# Altium PCB 14871_V1I1.PcbDoc (part 1 of 2)
Units mm, origin at the board's own origin, x right, y up, seen from the top; angles counter-clockwise.
Board outline 80 x 35 mm, 2 copper layers (L1, L2), stack 1.671 mm thick; 58 components, 31 nets, 145 pads, 63 vias.
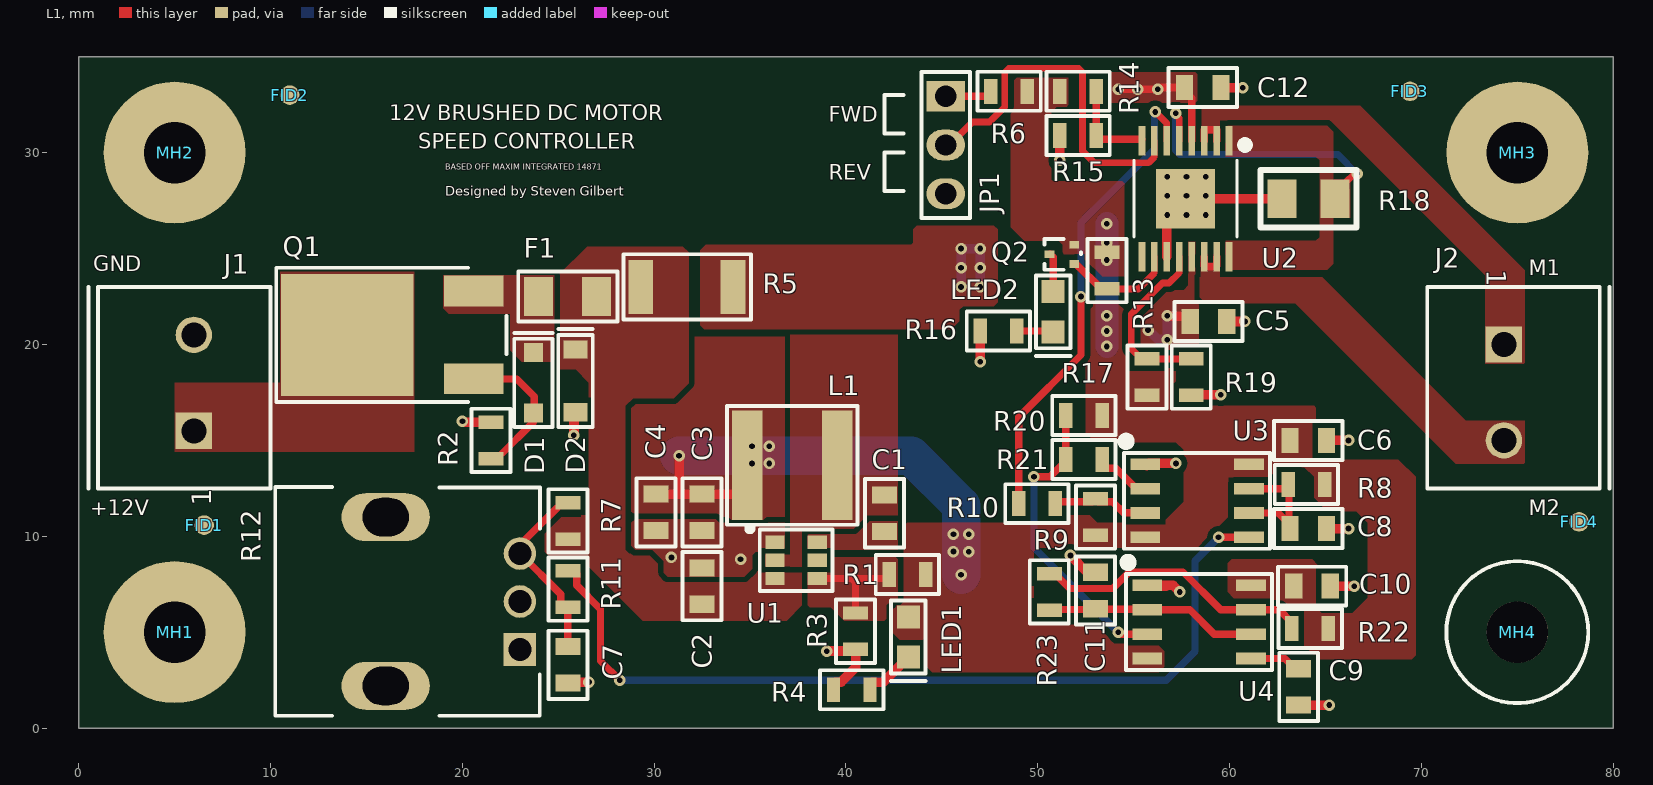
[diagram p0: L1 view]
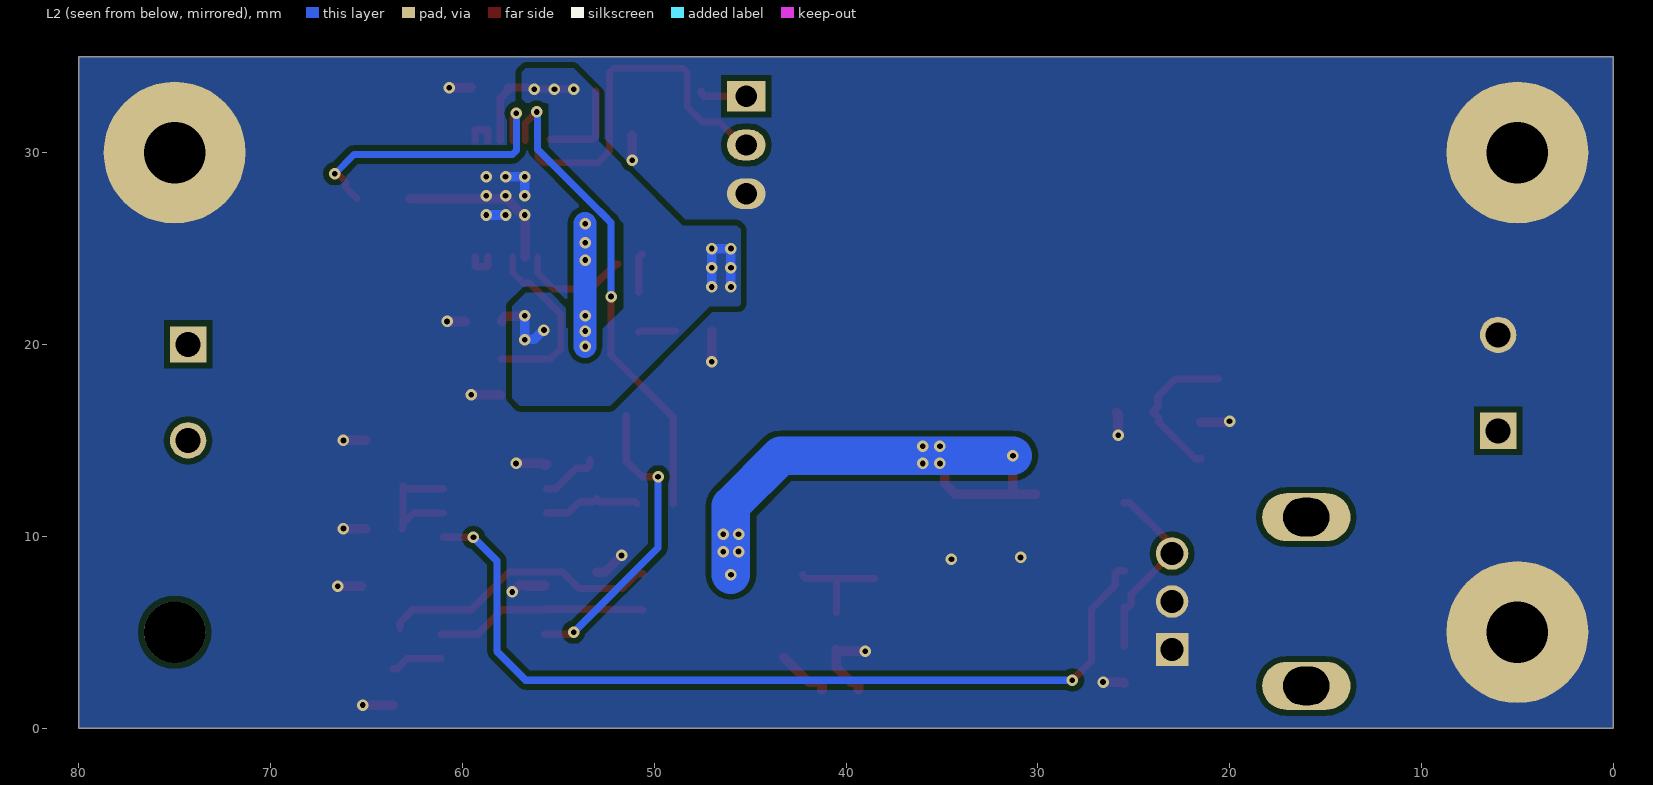
[diagram p1: L2 view, seen from below]

## Layer stack, top to bottom
Top Solder: solder mask 0.0102, Solder Resist, Dk 3.5
L1: signal copper 0.0356
Dielectric 1: dielectric 1.6, FR-4, Dk 4.8
L2: signal copper 0.0356
Bottom Solder: solder mask 0.0102, Solder Resist, Dk 3.5

## Board outline
0,0 80,0 80,35 0,35

## Design rules (kind name [scope] priority, off if disabled: settings)
Clearance Around_Polygons [IsRegion] p1: gap=0.3 ignorepadtopadclearanceinfootprint=FALSE
Clearance [All] p2: gap=0.2 ignorepadtopadclearanceinfootprint=FALSE
ComponentClearance [All] p1: gap=0.2 collisioncheckmode=3 verticalgap=0.2 showdistances=FALSE
HoleSize [All] p1: absolutevalues=TRUE maxlimit=10 minlimit=0.2 maxpercent=80.000 minpercent=20.000
HoleToHoleClearance [All] p1: gap=0.3 allowstackedmicrovias=TRUE
MinimumSolderMaskSliver [All] p1: minsoldermaskwidth=0.178
PolygonConnect [All] p1: connectstyle=Direct reliefconductorwidth=0.254 reliefentries=4 polygonreliefangle="90 Angle" airgapwidth=0.254
RoutingVias [All] p1: holewidth=0.3 width=0.6 viastyle="Through Hole" minholewidth=0.3 minwidth=0.6 maxholewidth=0.3 maxwidth=0.6
SilkToSilkClearance [All] p1: silktosilkclearance=0.1
SilkToSolderMaskClearance [IsPad] p1: minsilkscreentomaskgap=0.1 clearancetoexposedcopper=TRUE
SolderMaskExpansion [All] p1: expansion=0.1 istentingtop=FALSE
Width "Power Nets" [InNet('+*') or InNet('+12V') or InNet('+12V_DRIVER') or InNet('+5V')or InNet('+VIN') or InNet('M1') or InNet('M2') or InNet('VOUT') or InNet('VIN')] p1: maxlimit=4 minlimit=0.4 preferedwidth=0.4
Width [All] p2: maxlimit=0.5 minlimit=0.3 preferedwidth=0.3
24 further rules are at their usual default settings.

## Components (designator, comment, footprint, x,y, rotation, side; value= is the part's Value field where it differs from the comment)
C1 "0.1uF" C0805 42,11.2 r270 top
C2 "10uF" C0805 32.5,7.4 r270 top
C3 "22uF" C0805 32.5,11.25 r90 top
C4 "22uF" C0805 30.1,11.25 r90 top
C5 "1uF" C0805 58.9,21.2 r180 top
C6 "0.1uF" C0805 64.1,15 r0 top
C7 "0.1uF" C0805 25.5,3.3 r90 top
C8 "0.01uF" C0805 64.1,10.4 r180 top
C9 "0.1uF" C0805 63.6,2.15 r90 top
C10 "0.1uF" C0805 64.3,7.4 r0 top
C11 "0.01uF" C0805 53,7.173 r270 top
C12 "1uF" C0805 58.6,33.4 r180 top
D1 "10V" SOD123_ZENER 23.7,18 r270 top
D2 "16V" TVS_SOD123FL 25.9,18.1 r270 top
F1 "3A" FUSE1206 25.48,22.5 r0 top
FID1 "FID_1MM" FID_40X120D 6.541,10.583 r0 top
FID2 "FID_1MM" FID_40X120D 11,33 r90 top
FID3 "FID_1MM" FID_40X120D 69.4,33.2 r90 top
FID4 "FID_1MM" FID_40X120D 78.222,10.755 r180 top
J1 "1935161" 1935161 6,15.5 r180 top locked
J2 "1935161" 1935161 74.3,20 r0 top locked
JP1 "HDR 1x3" HDR_1X3_2.54MM 45.2,32.94 r0 top
L1 "4.7uH" NR6028T4R7M 37.2,13.7 r180 top
LED1 "LGR971-K1-1" "LED0805 - GREEN" 43.25,4.75 r90 top
LED2 "LSR976-NR-1" LED0805 50.8,21.7 r90 top
MH1 "MH_7.4MMC_3.2MMD" MH_7.4MMC_3.2MMD#1 5,5 r0 top
MH2 "MH_7.4MMC_3.2MMD" MH_7.4MMC_3.2MMD#2 5,36 r0 top
MH3 "MH_7.4MMC_3.2MMD" MH_7.4MMC_3.2MMD#3 46,34 r0 top
MH4 "MH_7.4MMNC_3.2MMD" MH_7.4MMD_3.2MMD_NON_COPPER_NPTH 75,5 r0 top
Q1 "AOD413A" TO252 17.3,20.5 r180 top
Q2 "DMP21D0UT-7" SOT523 51.255,24.7 r0 top
R1 "52K3" R0805 43.2,8 r180 top
R2 "200R" R0805 21.5,15 r90 top
R3 "10K" R0805 40.5,5.05 r270 top
R4 "200R" R0805 40.3,2 r180 top
R5 "0R" R2010 31.7,23 r180 top
R6 "1K" R0805 48.5,33.2 r180 top
R7 "7K15" R0805 25.5,10.8 r90 top
R8 "1K" R0805 64,12.7 r180 top
R9 "1K" R0805 53,11 r90 top
R10 "0R" R0805 49.95,11.7 r0 top
R11 "0R" R0805 25.5,7.25 r270 top
R12 "5K" TRIM_PT01-D120D-B502 16,6.6 r90 top locked
R13 "1K" R0805 53.6,23.85 r270 top
R14 "5K6" R0805 52.1,33.2 r0 top
R15 "1K" R0805 52.1,30.9 r180 top
R16 "200R" R0805 47.95,20.7 r180 top
R17 "4K02" R0805 55.7,18.3 r90 top
R18 "0R1" R1206 64.115,27.6 r180 top
R19 "1K" R0805 58,18.3 r270 top
R20 "1K" R0805 52.4,16.3 r180 top
R21 "0R" R0805 52.4,14 r180 top
R22 "3K" R0805 64.2,5.2 r180 top
R23 "1K" R0805 50.6,7.1 r270 top
U1 "AP62200WU-7" TSOT26 37.4,8.75 r0 top
U2 "MAX14871EUE+T" 21-0108_U16E+3_MXM-M 57.7,27.6 r270 top locked
U3 "NE555DR" 8-SOIC 58.3,11.85 r0 top
U4 "NE555DR" 8-SOIC 58.405,5.535 r0 top

## Footprints (in the part's own frame and the unit in brackets; to place one, negate y for a bottom-side part, rotate by r counter-clockwise, add the part's x,y. Pads: shape width x height; smd on the part's side, far side on the other; paste and mask are expansions set on the pad)
8-SOIC [mil]
  rect 61x24 smd: 1(-106.5,75) 2(-106.5,25) 3(-106.5,-25) 4(-106.5,-75) 5(106.5,-75) 6(106.5,-25) 7(106.5,25) 8(106.5,75)
  silkscreen extent -154,-98 150,130, body extent -118,-96 118,97, height 69
21-0108_U16E+3_MXM-M [mm]
  rect 1.553x0.355 smd paste+0 mask+0: 1(-3.025,2.275) 2(-3.025,1.625) 3(-3.025,0.975) 4(-3.025,0.325) 5(-3.025,-0.325) 6(-3.025,-0.975) 7(-3.025,-1.625) 8(-3.025,-2.275) 9(3.025,-2.275) 10(3.025,-1.625) 11(3.025,-0.975) 12(3.025,-0.325) 13(3.025,0.325) 14(3.025,0.975) 15(3.025,1.625) 16(3.025,2.275)
  rect 3.099x3.099 smd paste-1.537 mask+0: EPAD(0,0)
  silkscreen extent -2.95,-2.68 2,3.25, body extent -3.25,-2.55 3.25,2.55, height 1.09
1935161 [mm]
  rect 1.9x1.9 hole 1.3: 1(0,0)
  round 1.9 hole 1.3: 2(0,-5)
  silkscreen extent -4,-7.5 5.5,3, body extent -4,-7.45 5,2.95, height 11.41
C0805 [mm]
  rect 0.9x1.3 smd: 1(-0.95,0) 2(0.95,0)
  silkscreen extent -1.78,-1.02 1.78,1.02, body extent -1,-0.6 1,0.6, height 1.45
FID_40X120D [mil]
  round 40 smd paste-40 mask+40: 1(0,0)
FUSE1206 [mm]
  rect 1.52x2.03 smd: 1(-1.52,0) 2(1.52,0)
  silkscreen extent -2.56,-1.3 2.6,1.3, body extent -1.7,-0.9 1.7,0.9, height 1.17
HDR_1X3_2.54MM [mm]
  rect 2x1.6 hole 1.1: 1(0,0)
  oval 2x1.6 hole 1.1: 2(0,-2.54) 3(0,-5.08)
  silkscreen extent -1.27,-6.35 1.27,1.27, body extent -1.27,-6.35 1.27,1.27, height 9.21
LED0805 [mm]
  rect 1.2x1.2 smd: A(1.05,0) K(-1.05,0)
  silkscreen extent -2.3,-0.9 1.9,0.9, body extent -1,-0.62 1,0.63, height 1.11
"LED0805 - GREEN" [mm]
  rect 1.2x1.2 smd: A(1.05,0) K(-1.05,0)
  silkscreen extent -2.3,-0.9 1.9,0.9, body extent -1.01,-0.62 1.01,0.63, height 1.1
MH_7.4MMC_3.2MMD#1 [mm]
  round 7.4 hole 3.2: 1(0,0)
MH_7.4MMC_3.2MMD#2 [mm]
  round 7.4 hole 3.2: 1(0,-6)
MH_7.4MMC_3.2MMD#3 [mm]
  round 7.4 hole 3.2: 1(29,-4)
MH_7.4MMD_3.2MMD_NON_COPPER_NPTH [mm]
  round 3.2 hole 3.2 unplated: 1(0,0)
  silkscreen extent -3.7,-3.7 3.7,3.7
NR6028T4R7M [mm]
  rect 1.6x5.7 smd: 1(-2.35,0) 2(2.35,0)
  silkscreen extent -3.4,-3.1 3.4,3.1, body extent -3,-3 3,3, height 2.8
R0805 [mm]
  rect 0.7x1.3 smd: 1(-0.95,0) 2(0.95,0)
  silkscreen extent -1.65,-1.02 1.65,1.02, body extent -1.15,-0.68 1.15,0.68, height 0.72
R1206 [mm]
  rect 1.5x2 smd: 1(-1.385,0) 2(1.385,0)
  silkscreen extent -2.5,-1.5 2.5,1.5, body extent -1.6,-0.83 1.6,0.83, height 0.57
R2010 [mm]
  rect 1.3x2.8 smd: 1(-2.4,0) 2(2.4,0)
  silkscreen extent -3.35,-1.7 3.3,1.7, body extent -2.5,-1.25 2.5,1.25, height 0.6
SOD123_ZENER [mm]
  rect 1x1 smd: A(1.575,0) K(-1.575,0)
  silkscreen extent -2.6,-1 2.3,1, body extent -1.95,-0.9 1.95,0.9, height 1.18
SOT523 [mm]
  rect 0.51x0.4 smd: D(-0.645,0) G(0.645,-0.5) S(0.645,0.5)
  silkscreen extent -0.9,-0.8 1,0.8, body extent -0.8,-0.8 0.83,0.8, height 0.81
TO252 [mm]
  rect 6.9x6.35 smd: D(3.3,0)
  rect 3.1x1.6 smd: G(-3.3,2.286) S(-3.3,-2.286)
  silkscreen extent -5,-3.5 7,3.5, body extent -3.96,-3.27 5.95,3.27, height 2.56
TRIM_PT01-D120D-B502 [mm]
  rect 1.7x1.7 hole 1.2: 1(-2.5,-7)
  round 1.7 hole 1.2: 2(0,-7) 3(2.5,-7)
  oval 2.5x4.6 hole 2 slot 2.4 at 90 deg: S1(-4.4,0) S2(4.4,0)
  silkscreen extent -5.96,-8.04 5.96,5.76, body extent -5.7,-7.15 5.7,5.5, height 24.93
TSOT26 [mm]
  rect 1x0.7 smd mask+0.025: 1(-1.1,0.95) 2(-1.1,0) 3(-1.1,-0.95) 4(1.1,-0.95) 5(1.1,0) 6(1.1,0.95)
  silkscreen extent -2.55,-1.6 1.9,1.79, body extent -1.5,-1.55 1.5,1.55, height 1.4
TVS_SOD123FL [mm]
  rect 0.95x1.25 smd: A(1.635,0) K(-1.635,0)
  silkscreen extent -2.7,-0.9 2.4,0.9, body extent -1.79,-0.82 1.79,0.83, height 0.95

## Part data
C1 C6 C7 C9 C10: library part 08055C104KAT2A, "CAP CER 0.1UF X7R 50V 0805  +/-10%; 50WVDC; SMD; 2.5% Df; 0.037IN. ,", Capacitance=100nF, Case Code (Imperial)=0805, Case Code (Metric)=2012, Dielectric=X7R, Dielectric Material=Ceramic, Insulation Resistance=100GR, Manufacturer="Kyocera AVX", Max Operating Temperature=125°C, Min Operating Temperature=-55°C, Package Quantity=4000, Supplier Part Number 1=478-1395-1-ND, Tolerance=10%, Voltage=50V, Case/Package=0805, Category="Ceramic Capacitors", ComponentLink1Description=https://datasheet.ciiva.com/19475/2009691-19475858.pdf?src-supplier=Jameco, ComponentLink1URL=https://datasheet.ciiva.com/19475/2009691-19475858.pdf?src-supplier=Jameco, ComponentLink2Description=https://datasheet.ciiva.com/11786/0900766b802d4698-11786116.pdf?src-supplier=RSComponents, ComponentLink2URL=https://datasheet.ciiva.com/11786/0900766b802d4698-11786116.pdf?src-supplier=RSComponents, ComponentLink3Description=https://datasheet.ciiva.com/2988/cx7r-2988014.pdf?src-supplier=Avnet, ComponentLink3URL=https://datasheet.ciiva.com/2988/cx7r-2988014.pdf?src-supplier=Avnet, ComponentLink4Description=https://datasheet.ciiva.com/16199/cx7r-16199014.pdf?src-supplier=Future+Electronics, ComponentLink4URL=https://datasheet.ciiva.com/16199/cx7r-16199014.pdf?src-supplier=Future+Electronics, ComponentLink5Description=https://datasheet.ciiva.com/11504/cx7r-11504044.pdf?src-supplier=Avnet, ComponentLink5URL=https://datasheet.ciiva.com/11504/cx7r-11504044.pdf?src-supplier=Avnet, ComponentLink6Description=https://datasheet.ciiva.com/150/cx7r-150258.pdf?src-supplier=Digi-Key, ComponentLink6URL=https://datasheet.ciiva.com/150/cx7r-150258.pdf?src-supplier=Digi-Key, ComponentLink7Description=https://datasheet.ciiva.com/150/cx7r-150257.pdf?src-supplier=Digi-Key, ComponentLink7URL=https://datasheet.ciiva.com/150/cx7r-150257.pdf?src-supplier=Digi-Key, ComponentLink8Description=https://datasheet.ciiva.com/150/cx7r-150259.pdf?src-supplier=Digi-Key, ComponentLink8URL=https://datasheet.ciiva.com/150/cx7r-150259.pdf?src-supplier=Digi-Key, ComponentLink9Description=https://datasheet.ciiva.com/7812/cx7r-7812079.pdf?src-supplier=Element14, ComponentLink9URL=https://datasheet.ciiva.com/7812/cx7r-7812079.pdf?src-supplier=Element14, ComponentLink10Description=https://datasheet.ciiva.com/5416/cx7r-5416959.pdf?src-supplier=Mouser, ComponentLink10URL=https://datasheet.ciiva.com/5416/cx7r-5416959.pdf?src-supplier=Mouser, Depth=1.25mm, Dissipation Factor=2.5%, Height=0.5mm, Lead Free="Lead Free", Length=2mm, Manufacturer Part Number=08055C104KAT2A, Mount="Surface Mount,PCB", Number of Pins=2, Packaging="Cut Tape", Pricing 1="1=0.10000, 10=0.06700, 50=0.03640, 100=0.02970, 500=0.02120, 1000=0.01666 (USD)", Radiation Hardening=No, Reach SVHC Compliant=Yes, RoHS=Yes, RoHS Compliant=Yes, Series="MLCC X7R", Stock 1=12454485, Supplier 1=Digi-Key, Termination=Standard, Thickness=0.037inch, Voltage Rating=50V, Voltage Rating (DC)=50V, Weight=0.001411oz, Width=1.2mm
C2: library part GRM21BR61E106KA73L, "CAP CER 10UF 25V X5R 0805", Case Code (Imperial)=0805, Case Code (Metric)=2012, Dielectric=X5R, Manufacturer=Murata, Max Operating Temperature=85°C, Min Operating Temperature=-55°C, Package Quantity=1, Supplier Part Number 1=490-5523-1-ND, Tolerance=10%, Voltage=25V, Capacitance=10uF, Case/Package=0805, Category="Ceramic Capacitors", ComponentLink1Description=https://datasheet.ciiva.com/22774/1747469-22774396.pdf?src-supplier=Farnell, ComponentLink1URL=https://datasheet.ciiva.com/22774/1747469-22774396.pdf?src-supplier=Farnell, ComponentLink2Description=https://datasheet.ciiva.com/28584/626718-28584288.pdf?src-supplier=Element14, ComponentLink2URL=https://datasheet.ciiva.com/28584/626718-28584288.pdf?src-supplier=Element14, ComponentLink3Description=https://datasheet.ciiva.com/5424/product-5424327.pdf?src-supplier=Mouser, ComponentLink3URL=https://datasheet.ciiva.com/5424/product-5424327.pdf?src-supplier=Mouser, ComponentLink4Description=https://datasheet.ciiva.com/16440/grm21br61e106ka73l-16440627.pdf?src-supplier=Future+Electronics, ComponentLink4URL=https://datasheet.ciiva.com/16440/grm21br61e106ka73l-16440627.pdf?src-supplier=Future+Electronics, ComponentLink5Description=https://datasheet.ciiva.com/29199/454623-da-01-en-vs-kondensator-0805-29199615.pdf?src-supplier=Conrad, ComponentLink5URL=https://datasheet.ciiva.com/29199/454623-da-01-en-vs-kondensator-0805-29199615.pdf?src-supplier=Conrad, ComponentLink6Description=https://datasheet.ciiva.com/14116/grmseries-highdielectrictype-eng-14116376.pdf?src-supplier=Distrelec, ComponentLink6URL=https://datasheet.ciiva.com/14116/grmseries-highdielectrictype-eng-14116376.pdf?src-supplier=Distrelec, ComponentLink7Description=https://datasheet.ciiva.com/7719/1747469-7719093.pdf?src-supplier=Element14, ComponentLink7URL=https://datasheet.ciiva.com/7719/1747469-7719093.pdf?src-supplier=Element14, ComponentLink8Description=https://datasheet.ciiva.com/28584/626718-28584279.pdf?src-supplier=Element14, ComponentLink8URL=https://datasheet.ciiva.com/28584/626718-28584279.pdf?src-supplier=Element14, ComponentLink9Description=https://datasheet.ciiva.com/139/partnumbering-e-01-139183.pdf?src-supplier=Digi-Key, ComponentLink9URL=https://datasheet.ciiva.com/139/partnumbering-e-01-139183.pdf?src-supplier=Digi-Key, ComponentLink10Description=https://datasheet.ciiva.com/139/partnumbering-e-01-139182.pdf?src-supplier=Digi-Key, ComponentLink10URL=https://datasheet.ciiva.com/139/partnumbering-e-01-139182.pdf?src-supplier=Digi-Key, ComponentLink11Description=https://datasheet.ciiva.com/139/partnumbering-e-01-139184.pdf?src-supplier=Digi-Key, ComponentLink11URL=https://datasheet.ciiva.com/139/partnumbering-e-01-139184.pdf?src-supplier=Digi-Key, Construction=Flat, Depth=1.25mm, Height=1.25mm, Lead Free="Lead Free", Length=2mm, Manufacturer Part Number=GRM21BR61E106KA73L, Material=Ceramic, Mount="Surface Mount", Packaging="Tape and Reel", Pricing 1="1=0.25000, 10=0.17500, 50=0.11640, 100=0.09890, 500=0.06984, 1000=0.06111 (USD)", Radiation Hardening=No, Reach SVHC Compliant=Yes, RoHS=Yes, RoHS Compliant=Yes, Series=GRM, Stock 1=4346659, Supplier 1=Digi-Key, Termination=SMD/SMT, Thickness=0.053inch, Voltage Rating=25V, Voltage Rating (DC)=25V, Width=0.049inch
C3 C4: library part CL21A226MQQNNNG, "CAP CER 6.3V X5R 20% SMD 0805 85°C Embossed T/R", Case Code (Imperial)=0805, Case Code (Metric)=2012, Dielectric=X5R, Manufacturer=Samsung, Max Operating Temperature=85°C, Min Operating Temperature=-55°C, Package Quantity=3000, Supplier Part Number 1=1276-6460-1-ND, Tolerance=20%, Voltage=6.3V, Capacitance=22uF, Case/Package=0805, Category="Ceramic Capacitors", ComponentLink1Description=https://datasheet.ciiva.com/25728/cl21a226mqqnnng-25728680.pdf?src-supplier=Digi-Key, ComponentLink1URL=https://datasheet.ciiva.com/25728/cl21a226mqqnnng-25728680.pdf?src-supplier=Digi-Key, ComponentLink2Description=https://datasheet.ciiva.com/29199/454647-da-01-en-vs-kondensator-0805-29199620.pdf?src-supplier=Conrad, ComponentLink2URL=https://datasheet.ciiva.com/29199/454647-da-01-en-vs-kondensator-0805-29199620.pdf?src-supplier=Conrad, Construction=Flat, Depth=1.25mm, Height=1.25mm, Length=2mm, Manufacturer Part Number=CL21A226MQQNNNG, Material=Ceramic, Mount="Surface Mount", Packaging="Tape and Reel", Pricing 1="1=0.13000, 10=0.09300, 50=0.05300, 100=0.04380, 500=0.03074, 1000=0.02545 (USD)", Radiation Hardening=No, RoHS=Yes, RoHS Compliant=Yes, Series=CL, Stock 1=1010294, Supplier 1=Digi-Key, Thickness=0.055inch, Voltage Rating=6.3V, Width=0.049inch
C5 C12: library part 0805DC105KAT2A, "Cap Cer 1UF 35V X7R 0805", Case/Package=0805, Manufacturer="Kyocera AVX", Rating=35V, Supplier Part Number 1=478-0805DC105KAT2ACT-ND, Category="Ceramic Capacitors", ComponentLink1Description=http://www.mouser.com/ds/2/40/X7RDielectric-777024.pdf?src-supplier=Mouser, ComponentLink1URL=http://www.mouser.com/ds/2/40/X7RDielectric-777024.pdf?src-supplier=Mouser, Manufacturer Part Number=0805DC105KAT2A, Packaging="Tape and Reel", Pricing 1="1=0.22000, 10=0.15100, 50=0.09040, 100=0.07640, 500=0.05226, 1000=0.04623 (USD)", RoHS=Yes, Stock 1=25687, Supplier 1=Digi-Key
C8 C11: library part C0805C103K5RACTU, "CAP CER 0.01uF 50V X7R 10% SMD 0805 125C Plastic T/R", Capacitance=10nF, Case Code (Imperial)=0805, Case Code (Metric)=2012, Dielectric=X7R, Manufacturer=KEMET, Max Operating Temperature=125°C, Min Operating Temperature=-55°C, Package Quantity=4000, Supplier Part Number 1=399-C0805C103K5RAC7800CT-ND, Tolerance=10%, Voltage=50V, Case/Package=0805, Category="Ceramic Capacitors", ComponentLink1Description=http://www.farnell.com/datasheets/2740682.pdf?src-supplier=Farnell, ComponentLink1URL=http://www.farnell.com/datasheets/2740682.pdf?src-supplier=Farnell, ComponentLink2Description=http://www.onlinecomponents.com/productFiles/mf-KEM/kem_c1002_x7r_smd.pdf?src-supplier=Onlinecomponents.com, ComponentLink2URL=http://www.onlinecomponents.com/productFiles/mf-KEM/kem_c1002_x7r_smd.pdf?src-supplier=Onlinecomponents.com, ComponentLink3Description=https://www.verical.com/server-webapp/html/getDatasheet?partID=293414&src-supplier=Verical, ComponentLink3URL=https://www.verical.com/server-webapp/html/getDatasheet?partID=293414&src-supplier=Verical, ComponentLink4Description=http://www.farnell.com/datasheets/2740682.pdf?src-supplier=Newark, ComponentLink4URL=http://www.farnell.com/datasheets/2740682.pdf?src-supplier=Newark, ComponentLink5Description=http://www.farnell.com/datasheets/2740682.pdf?src-supplier=Element14, ComponentLink5URL=http://www.farnell.com/datasheets/2740682.pdf?src-supplier=Element14, ComponentLink6Description=https://api.kemet.com/component-edge/download/datasheet/C0805C103K5RACTU.pdf?src-supplier=Digi-Key, ComponentLink6URL=https://api.kemet.com/component-edge/download/datasheet/C0805C103K5RACTU.pdf?src-supplier=Digi-Key, ComponentLink7Description=http://www.kemet.com/Lists/ProductCatalog/Attachments/53/KEM_C1002_X7R_SMD.pdf?src-supplier=Avnet, ComponentLink7URL=http://www.kemet.com/Lists/ProductCatalog/Attachments/53/KEM_C1002_X7R_SMD.pdf?src-supplier=Avnet, Construction=Flat, Contact Plating=Tin,Matte, Depth=1.25mm, Height=0.78mm, Lead Pitch=0.75mm, Length=2mm, Manufacturer Part Number=C0805C103K5RACTU, Mount="Surface Mount", Packaging="Tape and Reel", Pricing 1="1=0.11000, 10=0.07500, 50=0.04260, 100=0.03530, 500=0.02476, 1000=0.02050 (USD)", Radiation Hardening=No, RoHS=Yes, Stock 1=3238718, Supplier 1=Digi-Key, Termination=SMD/SMT, Voltage Rating=50V, Voltage Rating (DC)=50V, Width=1.2mm
D1: library part BZT52C10-7-F, "Vz=10V 9.4V~10.6V Izt=5mA", Forward Voltage=900mV, Manufacturer=Diodes, Max Operating Temperature=150°C, Max Power Dissipation=500mW, Max Reverse Current=200nA, Min Operating Temperature=-65°C, Output Current=50mA, Package Quantity=3000, Supplier Part Number 1=BZT52C10-FDICT-ND, Test Current=5mA, Tolerance=6%, Category="Zener Diodes", ComponentLink1Description=https://datasheet.ciiva.com/15142/getdatasheetpartid-89980-15142547.pdf?src-supplier=Verical, ComponentLink1URL=https://datasheet.ciiva.com/15142/getdatasheetpartid-89980-15142547.pdf?src-supplier=Verical, ComponentLink2Description=https://datasheet.ciiva.com/27052/1539497-27052374.pdf?src-supplier=Jameco, ComponentLink2URL=https://datasheet.ciiva.com/27052/1539497-27052374.pdf?src-supplier=Jameco, Contact Plating=Tin,Matte, Element Configuration=Single, ESD Protection=No, Height=1.35mm, Impedance=20R, Lead Free="Lead Free", Length=2.85mm, Manufacturer Part Number=BZT52C10-7-F, Max Reverse Leakage Current=200nA, Mount="Surface Mount", Number of Pins=2, Packaging="Tape and Reel", Power Dissipation=500mW, Power Rating=500mW, Pricing 1="1=0.22000, 10=0.19900, 100=0.10830, 500=0.06662, 1000=0.04542 (USD)", Radiation Hardening=No, RoHS=Yes, RoHS Compliant=Yes, Series=-, Stock 1=627176, Supplier 1=Digi-Key, Termination=SMD/SMT, Voltage Rating (DC)=10V, Voltage Tolerance=6%, Weight=0.000353oz, Width=1.7mm, Working Voltage=10V, Zener Current=5mA, Zener Voltage=10V
D2: library part SMF16A-TP, "TVS DIODE 16VWM 26VC SOD123FL", Clamping Voltage=26V, Leakage Current=1uA, Manufacturer=MCC, Max Breakdown Voltage=19.7V, Max Operating Temperature=175°C, Min Breakdown Voltage=17.8V, Min Operating Temperature=-65°C, Package Quantity=1, Peak Pulse Current=7.7A, Peak Pulse Power=200W, Power Line Protection=No, Resistor Type=Zener, Supplier Part Number 1=SMF16A-TPMSCT-ND, Category="TVS Diodes", Clamping Voltage-Max=26V, ComponentLink1Description=https://datasheet.ciiva.com/6574/smf5-0170sod-123fl-6574110.pdf?src-supplier=Digi-Key, ComponentLink1URL=https://datasheet.ciiva.com/6574/smf5-0170sod-123fl-6574110.pdf?src-supplier=Digi-Key, ComponentLink2Description=https://datasheet.ciiva.com/6574/smf5-0170sod-123fl-6574111.pdf?src-supplier=Digi-Key, ComponentLink2URL=https://datasheet.ciiva.com/6574/smf5-0170sod-123fl-6574111.pdf?src-supplier=Digi-Key, Depth=1.8mm, Diode Type=ZENER, Direction=Unidirectional, Element Configuration=Single, Lead Free="Lead Free", Length=2.85mm, Manufacturer Part Number=SMF16A-TP, Mount="Surface Mount", Number of Pins=2, Number of Unidirectional Channels=1, Packaging="Tape and Reel", Power Dissipation=200W, Pricing 1="1=0.43000, 10=0.32600, 100=0.20330, 500=0.13910, 1000=0.10700 (USD)", Radiation Hardening=No, Reverse Standoff Voltage=16V, RoHS=Yes, RoHS Compliant=Yes, Series=-, Stock 1=30285, Supplier 1=Digi-Key, Working Voltage=16V
F1: library part 0685T3000-01, "Fuse Chip 3A 63V Slow Blow 2-Pin T/R", Case Code (Imperial)=1206, Case Code (Metric)=3216, DC Cold Resistance=54mR, Manufacturer=Bel, Max Operating Temperature=125°C, Min Operating Temperature=-55°C, Supplier Part Number 1=507-1896-1-ND, Voltage Rating (AC)=63V, Approvals=CE,cURus, Case/Package=1206, Category=Fuses, ComponentLink1Description=https://belfuse.com/resources/datasheets/circuitprotection/ds-cp-c1t-series.pdf?src-supplier=Digi-Key, ComponentLink1URL=https://belfuse.com/resources/datasheets/circuitprotection/ds-cp-c1t-series.pdf?src-supplier=Digi-Key, Current Rating=3A, Fuse Type="Board Mount (Cartridge Style Excluded)", Manufacturer Part Number=0685T3000-01, Mount="Surface Mount", Packaging="Tape and Reel", Pricing 1="1=0.30000, 5=0.29600, 10=0.28200, 50=0.25180, 100=0.23450, 250=0.20848, 500=0.17372, 1000=0.16503 (USD)", RoHS=Yes, RoHS Compliant=Yes, Stock 1=409603, Supplier 1=Digi-Key, Voltage Rating (DC)=63V
FID1 FID2 FID3 FID4: library part FID_1mm, "Fiducial 40mil diameter, 120 Mask"
J1 J2: "Conn PC Terminal Block 2 POS 5mm Solder ST Thru-Hole 17.5A", Color=Green, Current=18A, Current Rating=17.5A, Flammability Rating="UL94 V-0", Manufacturer="Phoenix Contact", Max Current Rating=16A, Max Supply Voltage=250V, Package Quantity=250, Supplier Part Number 1=277-1667-ND, Voltage=300V, Voltage Rating (DC)=320V, Approvals=UL, Category="Terminal Blocks", ComponentLink1Description=https://datasheet.ciiva.com/16047/1935161-16047247.pdf?src-supplier=Onlinecomponents.com, ComponentLink1URL=https://datasheet.ciiva.com/16047/1935161-16047247.pdf?src-supplier=Onlinecomponents.com, ComponentLink2Description=https://datasheet.ciiva.com/15169/getdatasheetpartid-177903-15169663.pdf?src-supplier=Verical, ComponentLink2URL=https://datasheet.ciiva.com/15169/getdatasheetpartid-177903-15169663.pdf?src-supplier=Verical, ComponentLink3Description=https://datasheet.ciiva.com/824/combiconcompact5-0mmseries-824222.pdf?src-supplier=Digi-Key, ComponentLink3URL=https://datasheet.ciiva.com/824/combiconcompact5-0mmseries-824222.pdf?src-supplier=Digi-Key, Connector Type=Screw, Contact Material=Copper,Tin, Depth=9mm, Height=11.3mm, Housing Color=Green, Housing Material=Polyamide, Insulation Material=Nylon, Lead Free="Lead Free", Length=9mm, Manufacturer Part Number=1935161, Material=Nylon, Mount="Through Hole", Number of Circuits=2, Number of Contacts=2, Number of Levels=1, Number of Pins=2, Number of Poles=2, Number of Positions=2, Number of Positions Per Level=2, Number of Rows=1, Number of Ways=2, Orientation=Straight, Packaging=Bulk, Pitch=5mm, Pricing 1="1=0.54000, 10=0.47200, 50=0.45100, 100=0.43870, 250=0.41000, 500=0.37720, 1000=0.36550 (USD)", Radiation Hardening=No, RoHS=Yes, RoHS Compliant=Yes, Series="COMBICON PT", Stock 1=238571, Supplier 1=Digi-Key, Termination=Solder, Voltage Rating=250V, Weight=0.067021oz, Width=14.9mm, Wire Gauge (Max)=26AWG, Wire Gauge (Min)=12AWG, Wire/Cable Gauge=26AWG
JP1: library part 68000-103HLF, "CONN HEADER VERT 3POS 2.54MM"
L1: library part NR6028T4R7M, "Inductor Power Shielded Wirewound 4.7uH 20% 100KHz Ferrite 3A 0.0403Ohm DCR 2424 T/R", Case/Package=2424, Current Rating=3A, DC Resistance (DCR)=40.3mR, Inductance Tolerance=20%, Manufacturer="Taiyo Yuden", Max Operating Temperature=120°C, Min Operating Temperature=-25°C, Package Quantity=2000, Resistor Type=Wirewound, Saturation Current=2.7A, Self Resonant Frequency=39MHz, Supplier Part Number 1=587-2100-1-ND, Test Frequency=100kHz, Category="Fixed Inductors", ComponentLink1Description=https://datasheet.ciiva.com/7291/nr6028t4r7m-ss-7291638.pdf?src-supplier=Newark, ComponentLink1URL=https://datasheet.ciiva.com/7291/nr6028t4r7m-ss-7291638.pdf?src-supplier=Newark, ComponentLink2Description=https://datasheet.ciiva.com/8502/nr6028t4r7m-ss-8502688.pdf?src-supplier=Avnet, ComponentLink2URL=https://datasheet.ciiva.com/8502/nr6028t4r7m-ss-8502688.pdf?src-supplier=Avnet, ComponentLink3Description=https://datasheet.ciiva.com/15988/314nr6028t4r7m-15988117.pdf?src-supplier=Onlinecomponents.com, ComponentLink3URL=https://datasheet.ciiva.com/15988/314nr6028t4r7m-15988117.pdf?src-supplier=Onlinecomponents.com, ComponentLink4Description=https://datasheet.ciiva.com/1043/wound04-e-1043082.pdf?src-supplier=Digi-Key, ComponentLink4URL=https://datasheet.ciiva.com/1043/wound04-e-1043082.pdf?src-supplier=Digi-Key, ComponentLink5Description=https://datasheet.ciiva.com/1043/wound04-e-1043081.pdf?src-supplier=Digi-Key, ComponentLink5URL=https://datasheet.ciiva.com/1043/wound04-e-1043081.pdf?src-supplier=Digi-Key, ComponentLink6Description=https://datasheet.ciiva.com/1043/wound04-e-1043083.pdf?src-supplier=Digi-Key, ComponentLink6URL=https://datasheet.ciiva.com/1043/wound04-e-1043083.pdf?src-supplier=Digi-Key, ComponentLink7Description=https://datasheet.ciiva.com/4955/wound04-e-4955707.pdf?src-supplier=Mouser, ComponentLink7URL=https://datasheet.ciiva.com/4955/wound04-e-4955707.pdf?src-supplier=Mouser, Core Material=Ferrite, Depth=6.2mm, Halogen Free="Halogen Free", Height=2.8mm, Height - Seated (Max)=0.11inch, Inductance=4.7uH, Lead Free="Lead Free", Length=0.236inch, Manufacturer Part Number=NR6028T4R7M, Max DC Current=3A, Mount="Surface Mount", Number of Pins=2, Packaging="Tape and Reel", Pricing 1="1=0.36000, 10=0.31900, 25=0.27920, 50=0.23940, 100=0.21940, 250=0.19948, 500=0.18750, 1000=0.14362 (USD)", Radiation Hardening=No, RMS Current (Irms)=3A, RoHS=Yes, RoHS Compliant=Yes, Series=NR, Shielding=Shielded, Stock 1=261825, Supplier 1=Digi-Key, Termination=SMD/SMT, Tolerance=20%, Width=0.236inch
LED1: "LED SMT GREEN 0805", Case/Package=0805, Illumination Color=Green, Supplier Part Number 1=475-1410-1-ND
LED2: "LED SMT RED 0805", Case Code (Imperial)=0805, Case Code (Metric)=2012, Color=Red, Forward Current=25mA, Forward Voltage=2.5V, Lens Color=White, Manufacturer="Osram Opto", Max Operating Temperature=85°C, Min Operating Temperature=-30°C, Package Quantity=16000, Power Dissipation=65mW, Reverse Voltage=12V, Supplier Part Number 1=720-LSR976-NR-1, Test Current=20mA, Case/Package=0805, Category=Uncategorized, ComponentLink1Description=https://datasheet.ciiva.com/4688/o-ls-ly-r976-24152-4688435.pdf?src-supplier=Mouser, ComponentLink1URL=https://datasheet.ciiva.com/4688/o-ls-ly-r976-24152-4688435.pdf?src-supplier=Mouser, ComponentLink2Description=https://datasheet.ciiva.com/26920/getdatasheetpartid-568367-26920831.pdf?src-supplier=Verical, ComponentLink2URL=https://datasheet.ciiva.com/26920/getdatasheetpartid-568367-26920831.pdf?src-supplier=Verical, ComponentLink3Description=https://datasheet.ciiva.com/2112/00078896-0-2112782.pdf?src-supplier=Digi-Key, ComponentLink3URL=https://datasheet.ciiva.com/2112/00078896-0-2112782.pdf?src-supplier=Digi-Key, ComponentLink4Description=https://datasheet.ciiva.com/2112/00078896-0-2112781.pdf?src-supplier=Digi-Key, ComponentLink4URL=https://datasheet.ciiva.com/2112/00078896-0-2112781.pdf?src-supplier=Digi-Key, ComponentLink5Description=https://datasheet.ciiva.com/2112/00078896-0-2112783.pdf?src-supplier=Digi-Key, ComponentLink5URL=https://datasheet.ciiva.com/2112/00078896-0-2112783.pdf?src-supplier=Digi-Key, Depth=1.35mm, Dominant Wavelength=633nm, Height=0.9mm, Illumination Color=Red, Length=2.1mm, Lens Size=1.25mm, Lens Style=Flat,Diffused,Colorless,Rectangular, Lens Transparency=Diffused, Luminous Flux=0.47lm, Luminous Intensity=180mcd, Manufacturer Part Number=LSR976-NR-1, Mount="Surface Mount", Number of Elements=1, Number of LEDs=1, Number of Pins=2, Packaging="Tape and Reel", Pricing 1="1=0.30000, 10=0.16400, 50=0.16400, 100=0.07700, 500=0.07100, 1000=0.05400, 5000=0.04700, 10000=0.04300, 16000=0.03700 (USD)", Radiation Hardening=No, RoHS=Yes, RoHS Compliant=Yes, Series="CHIPLED 0805", Stock 1=1195318, Supplier 1=Mouser, Viewing Angle=160°, Width=1.25mm
MH1 MH2 MH3: "Mounting Hole 7.4mm Diameter, 3.2mm Drill"
MH4: "Hole 7.4MM Diameter (Non Copper), 3.2mm Drill NPTH"
Q1: "MOSFET P-CH 40V 12A TO252", Case/Package=TO-252-3, Continuous Drain Current (ID)=12A, Drain to Source Voltage (Vdss)=40V, Gate to Source Voltage (Vgs)=20V, Input Capacitance=1.125nF, Manufacturer="Alpha & Omega Semiconductor", Max Operating Temperature=175°C, Max Power Dissipation=50W, Min Operating Temperature=-55°C, Package Quantity=2500, Supplier Part Number 1=785-1218-1-ND, Category=MOSFETs, ComponentLink1Description=https://datasheet.ciiva.com/6367/aod413a-6367556.pdf?src-supplier=Digi-Key, ComponentLink1URL=https://datasheet.ciiva.com/6367/aod413a-6367556.pdf?src-supplier=Digi-Key, ComponentLink2Description=https://datasheet.ciiva.com/6367/aod413a-6367558.pdf?src-supplier=Digi-Key, ComponentLink2URL=https://datasheet.ciiva.com/6367/aod413a-6367558.pdf?src-supplier=Digi-Key, ComponentLink3Description=https://datasheet.ciiva.com/6367/aod413a-6367560.pdf?src-supplier=Digi-Key, ComponentLink3URL=https://datasheet.ciiva.com/6367/aod413a-6367560.pdf?src-supplier=Digi-Key, Lead Free="Lead Free", Manufacturer Part Number=AOD413A, Mount="Surface Mount", Number of Elements=1, Number of Pins=3, Packaging="Tape and Reel", Power Dissipation=50W, Pricing 1="1=0.61000, 10=0.54100, 100=0.41440, 500=0.32760, 1000=0.26208 (USD)", Rds On Max=44mR, RoHS=Yes, RoHS Compliant=Yes, Stock 1=406428, Supplier 1=Digi-Key
Q2: "MOSFET P-CH 20V 0.59A SOT523", Case/Package=SOT-523, Continuous Drain Current (ID)=650mA, Drain to Source Resistance=495mR, Drain to Source Voltage (Vdss)=20V, Gate to Source Voltage (Vgs)=8V, Input Capacitance=80pF, Manufacturer=Diodes, Max Operating Temperature=150°C, Max Power Dissipation=240mW, Min Operating Temperature=-55°C, Package Quantity=3000, Supplier Part Number 1=DMP21D0UT-7DICT-ND, Category=MOSFETs, ComponentLink1Description=https://datasheet.ciiva.com/13055/dmp21d0ut-13055589.pdf?src-supplier=Mouser, ComponentLink1URL=https://datasheet.ciiva.com/13055/dmp21d0ut-13055589.pdf?src-supplier=Mouser, ComponentLink2Description=https://datasheet.ciiva.com/30480/0900766b8115c368-30480035.pdf?src-supplier=RSComponents, ComponentLink2URL=https://datasheet.ciiva.com/30480/0900766b8115c368-30480035.pdf?src-supplier=RSComponents, ComponentLink3Description=https://datasheet.ciiva.com/30023/dmp21d0ut-30023816.pdf?src-supplier=Avnet, ComponentLink3URL=https://datasheet.ciiva.com/30023/dmp21d0ut-30023816.pdf?src-supplier=Avnet, ComponentLink4Description=https://datasheet.ciiva.com/934/dmp21d0ut-934695.pdf?src-supplier=Digi-Key, ComponentLink4URL=https://datasheet.ciiva.com/934/dmp21d0ut-934695.pdf?src-supplier=Digi-Key, ComponentLink5Description=https://datasheet.ciiva.com/934/dmp21d0ut-934696.pdf?src-supplier=Digi-Key, ComponentLink5URL=https://datasheet.ciiva.com/934/dmp21d0ut-934696.pdf?src-supplier=Digi-Key, ComponentLink6Description=https://datasheet.ciiva.com/934/dmp21d0ut-934694.pdf?src-supplier=Digi-Key, ComponentLink6URL=https://datasheet.ciiva.com/934/dmp21d0ut-934694.pdf?src-supplier=Digi-Key, Element Configuration=Single, Fall Time=18.5ns, Height=0.8mm, Lead Free="Lead Free", Length=1.7mm, Manufacturer Part Number=DMP21D0UT-7, Mount="Surface Mount", Number of Channels=1, Number of Pins=3, Packaging="Tape and Reel", Polarity=P-CHANNEL, Pricing 1="1=0.41000, 10=0.30900, 100=0.19230, 500=0.13156, 1000=0.10120 (USD)", Radiation Hardening=No, Rds On Max=495mR, Reach SVHC Compliant=Yes, Rise Time=8ns, RoHS=Yes, RoHS Compliant=Yes, Series=-, Stock 1=2029106, Supplier 1=Digi-Key, Turn-Off Delay Time=31.7ns, Turn-On Delay Time=7.1ns, Weight=7.1E-05oz, Width=0.85mm
R1: library part RC0805FR-0752K3L, "RES SMD 52K3 OHM 1% 1/8W 0805 ±100ppm/°C SMD Paper T/R", Case Code (Imperial)=0805, Case Code (Metric)=2012, Manufacturer=Yageo, Max Operating Temperature=155°C, Max Power Dissipation=125mW, Min Operating Temperature=-55°C, Package Quantity=1, Resistance=52.3kR, Resistor Type="Thick Film", Supplier Part Number 1=311-52.3KCRCT-ND, Temperature Coefficient=100ppm/°C, Tolerance=1%, Voltage Rating=150V, Case/Package=0805, Category="Chip SMD Resistors", ComponentLink1Description=https://datasheet.ciiva.com/2457/pyu-r-int-thick-7-2457498.pdf?src-supplier=Digi-Key, ComponentLink1URL=https://datasheet.ciiva.com/2457/pyu-r-int-thick-7-2457498.pdf?src-supplier=Digi-Key, ComponentLink2Description=https://datasheet.ciiva.com/2457/pyu-r-int-thick-7-2457499.pdf?src-supplier=Digi-Key, ComponentLink2URL=https://datasheet.ciiva.com/2457/pyu-r-int-thick-7-2457499.pdf?src-supplier=Digi-Key, ComponentLink3Description=https://datasheet.ciiva.com/2457/pyu-r-int-thick-7-2457497.pdf?src-supplier=Digi-Key, ComponentLink3URL=https://datasheet.ciiva.com/2457/pyu-r-int-thick-7-2457497.pdf?src-supplier=Digi-Key, Construction=Rectangular, Contact Plating=Tin,Lead,Matte, Depth=1.25mm, Features="Moisture Resistant", Height=0.024inch, Lead Free="Lead Free", Length=2mm, Manufacturer Part Number=RC0805FR-0752K3L, Military Standard=Not, Number of Terminations=2, Packaging="Tape and Reel", Power Rating=125mW, Pricing 1="1=0.10000, 10=0.03600, 100=0.01480, 1000=0.00666, 2500=0.00578 (USD)", Radiation Hardening=No, RoHS=Yes, RoHS Compliant=Yes, Series=RC, Size Code=0805, Stock 1=66100, Supplier 1=Digi-Key, Termination=SMD/SMT, Voltage Rating (DC)=150V, Width=1.25mm
R2 R4 R16: library part RC0805FR-07200RL, "RES SMD 200 OHM 1% 1/8W 0805 ±100ppm/°C", Case Code (Imperial)=0805, Case Code (Metric)=2012, Manufacturer=Yageo, Max Operating Temperature=155°C, Max Power Dissipation=125mW, Min Operating Temperature=-55°C, Package Quantity=1, Resistor Type="Thick Film", Supplier Part Number 1=311-200CRCT-ND, Temperature Coefficient=100ppm/°C, Tolerance=1%, Voltage Rating=150V, Case/Package=0805, Category="Chip SMD Resistors", ComponentLink1Description=https://datasheet.ciiva.com/2519/pyu-r-int-thick-7-2519721.pdf?src-supplier=Digi-Key, ComponentLink1URL=https://datasheet.ciiva.com/2519/pyu-r-int-thick-7-2519721.pdf?src-supplier=Digi-Key, ComponentLink2Description=https://datasheet.ciiva.com/2519/pyu-r-int-thick-7-2519722.pdf?src-supplier=Digi-Key, ComponentLink2URL=https://datasheet.ciiva.com/2519/pyu-r-int-thick-7-2519722.pdf?src-supplier=Digi-Key, ComponentLink3Description=https://datasheet.ciiva.com/2519/pyu-r-int-thick-7-2519720.pdf?src-supplier=Digi-Key, ComponentLink3URL=https://datasheet.ciiva.com/2519/pyu-r-int-thick-7-2519720.pdf?src-supplier=Digi-Key, ComponentLink4Description=https://datasheet.ciiva.com/12667/rc0805-12667066.pdf?src-supplier=Mouser, ComponentLink4URL=https://datasheet.ciiva.com/12667/rc0805-12667066.pdf?src-supplier=Mouser, ComponentLink5Description=https://datasheet.ciiva.com/15189/getdatasheetpartid-327982-15189926.pdf?src-supplier=Verical, ComponentLink5URL=https://datasheet.ciiva.com/15189/getdatasheetpartid-327982-15189926.pdf?src-supplier=Verical, Construction=Rectangular, Depth=1.25mm, Features="Moisture Resistant", Height=0.024inch, Lead Free="Lead Free", Length=2mm, Manufacturer Part Number=RC0805FR-07200RL, Military Standard=Not, Mount="Surface Mount", Number of Terminations=2, Packaging="Tape and Reel", Power Rating=125mW, Pricing 1="1=0.10000, 10=0.03600, 100=0.01480, 1000=0.00666, 2500=0.00578 (USD)", Resistance=200R, RoHS=Yes, RoHS Compliant=Yes, Series=RC, Size Code=0805, Stock 1=939589, Supplier 1=Digi-Key, Termination=SMD/SMT, Voltage Rating (DC)=150V, Width=0.049inch
R3: library part RC0805FR-0710KL, "RES SMD 10K OHM 1% 1/8W  0805 Thick Film+/-100ppm/C Epoxy Pad SMD T/R", Case Code (Imperial)=0805, Case Code (Metric)=2012, Manufacturer=Yageo, Max Operating Temperature=155°C, Max Power Dissipation=125mW, Min Operating Temperature=-55°C, Package Quantity=1, Resistance=10kR, Resistance Tolerance=1%, Resistor Type="Thick Film", Supplier Part Number 1=311-10.0KCRCT-ND, Temperature Coefficient=100ppm/°C, Voltage Rating=150V, Case/Package=0805, Category="Chip SMD Resistors", ComponentLink1Description=https://datasheet.ciiva.com/11808/0900766b8106beab-11808151.pdf?src-supplier=RSComponents, ComponentLink1URL=https://datasheet.ciiva.com/11808/0900766b8106beab-11808151.pdf?src-supplier=RSComponents, ComponentLink2Description=https://datasheet.ciiva.com/46447/444164-46447563.pdf?src-supplier=Element14, ComponentLink2URL=https://datasheet.ciiva.com/46447/444164-46447563.pdf?src-supplier=Element14, ComponentLink3Description=https://datasheet.ciiva.com/2456/pyu-r-int-thick-7-2456973.pdf?src-supplier=Digi-Key, ComponentLink3URL=https://datasheet.ciiva.com/2456/pyu-r-int-thick-7-2456973.pdf?src-supplier=Digi-Key, ComponentLink4Description=https://datasheet.ciiva.com/2456/pyu-r-int-thick-7-2456974.pdf?src-supplier=Digi-Key, ComponentLink4URL=https://datasheet.ciiva.com/2456/pyu-r-int-thick-7-2456974.pdf?src-supplier=Digi-Key, ComponentLink5Description=https://datasheet.ciiva.com/2456/pyu-r-int-thick-7-2456972.pdf?src-supplier=Digi-Key, ComponentLink5URL=https://datasheet.ciiva.com/2456/pyu-r-int-thick-7-2456972.pdf?src-supplier=Digi-Key, ComponentLink6Description=https://datasheet.ciiva.com/12669/rc0805-12669688.pdf?src-supplier=Mouser, ComponentLink6URL=https://datasheet.ciiva.com/12669/rc0805-12669688.pdf?src-supplier=Mouser, ComponentLink7Description=https://datasheet.ciiva.com/16747/rc0805-16747087.pdf?src-supplier=Future+Electronics, ComponentLink7URL=https://datasheet.ciiva.com/16747/rc0805-16747087.pdf?src-supplier=Future+Electronics, Construction=Rectangular, Depth=1.25mm, Features="Moisture Resistant", Height=0.024inch, Lead Free="Lead Free", Length=0.079inch, Manufacturer Part Number=RC0805FR-0710KL, Military Standard=Not, Number of Terminations=2, Packaging="Tape and Reel", Power Rating=125mW, Pricing 1="1=0.10000, 10=0.03700, 100=0.01490, 1000=0.00669, 2500=0.00581 (USD)", RoHS=Yes, RoHS Compliant=Yes, Series=RC, Size Code=0805, Stock 1=11341268, Supplier 1=Digi-Key, Technology="THICK FILM", Termination=SMD/SMT, Tolerance=1%, Width=0.049inch
R5: library part RMCF2010ZT0R00, "Res Thick Film 2010 0 Ohm Molded SMD Automotive Plastic T/R", Case Code (Imperial)=2010, Case Code (Metric)=5025, Manufacturer="Stackpole Electronics", Max Operating Temperature=155°C, Max Power Dissipation=750mW, Min Operating Temperature=-55°C, Resistor Type="Thick Film", Supplier Part Number 1=RMCF2010ZT0R00CT-ND, Case/Package=2010, Category="Chip SMD Resistors", ComponentLink1Description=http://components.arrow.com/part/dataview/55788137S308674N1174?src-supplier=Arrow+Electronics, ComponentLink1URL=http://components.arrow.com/part/dataview/55788137S308674N1174?src-supplier=Arrow+Electronics, ComponentLink2Description=https://www.seielect.com/catalog/SEI-Packaging.pdf?src-supplier=Digi-Key, ComponentLink2URL=https://www.seielect.com/catalog/SEI-Packaging.pdf?src-supplier=Digi-Key, ComponentLink3Description=https://www.seielect.com/Catalog/SEI-RMCF_RMCP.pdf?src-supplier=Digi-Key, ComponentLink3URL=https://www.seielect.com/Catalog/SEI-RMCF_RMCP.pdf?src-supplier=Digi-Key, ComponentLink4Description=https://www.seielect.com/catalog/SEI-RMCF_RMCP.pdf?src-supplier=Avnet, ComponentLink4URL=https://www.seielect.com/catalog/SEI-RMCF_RMCP.pdf?src-supplier=Avnet, ComponentLink5Description=http://www.seielect.com/Catalog/SEI-RMC.pdf?src-supplier=Future+Electronics, ComponentLink5URL=http://www.seielect.com/Catalog/SEI-RMC.pdf?src-supplier=Future+Electronics, ComponentLink6Description=https://www.verical.com/server-webapp/html/getDatasheet?partID=691632&src-supplier=Verical, ComponentLink6URL=https://www.verical.com/server-webapp/html/getDatasheet?partID=691632&src-supplier=Verical, Construction=Rectangular, Contact Plating=Tin,Matte, Depth=2.5mm, Features="Automotive AEC-Q200", Height=0.028inch, Lead Free="Lead Free", Length=0.197inch, Manufacturer Part Number=RMCF2010ZT0R00, Military Standard=Not, Mount="Surface Mount", Number of Terminations=2, Packaging="Tape and Reel", Power Rating=750mW, Pricing 1="1=0.20000, 10=0.16700, 25=0.12120, 50=0.08780, 100=0.06510, 250=0.05000, 500=0.03940, 1000=0.02727 (USD)", Radiation Hardening=No, Resistance=0R, RoHS=Yes, RoHS Compliant=Yes, Series=RMCF, Size Code=2010, Stock 1=436684, Supplier 1=Digi-Key, Width=0.098inch
R6 R8 R9 R13 R15 R19 R20 R23: library part RC0805FR-071KL, "RES SMD 1K OHM 1% 1/8W 0805", Case Code (Imperial)=0805, Case Code (Metric)=2012, Manufacturer=Yageo, Max Operating Temperature=155°C, Max Power Dissipation=125mW, Min Operating Temperature=-55°C, Package Quantity=1, Resistance=1kR, Resistance Tolerance=1%, Resistor Type="Thick Film", Supplier Part Number 1=311-1.00KCRCT-ND, Temperature Coefficient=100ppm/°C, Voltage Rating=150V, Case/Package=0805, Category="Chip SMD Resistors", ComponentLink1Description=https://datasheet.ciiva.com/7941/1686128-7941719.pdf?src-supplier=Element14, ComponentLink1URL=https://datasheet.ciiva.com/7941/1686128-7941719.pdf?src-supplier=Element14, ComponentLink2Description=https://datasheet.ciiva.com/46385/444164-46385020.pdf?src-supplier=Element14, ComponentLink2URL=https://datasheet.ciiva.com/46385/444164-46385020.pdf?src-supplier=Element14, ComponentLink3Description=https://datasheet.ciiva.com/2456/pyu-r-int-thick-7-2456976.pdf?src-supplier=Digi-Key, ComponentLink3URL=https://datasheet.ciiva.com/2456/pyu-r-int-thick-7-2456976.pdf?src-supplier=Digi-Key, ComponentLink4Description=https://datasheet.ciiva.com/2456/pyu-r-int-thick-7-2456977.pdf?src-supplier=Digi-Key, ComponentLink4URL=https://datasheet.ciiva.com/2456/pyu-r-int-thick-7-2456977.pdf?src-supplier=Digi-Key, ComponentLink5Description=https://datasheet.ciiva.com/2456/pyu-r-int-thick-7-2456975.pdf?src-supplier=Digi-Key, ComponentLink5URL=https://datasheet.ciiva.com/2456/pyu-r-int-thick-7-2456975.pdf?src-supplier=Digi-Key, ComponentLink6Description=https://datasheet.ciiva.com/16850/rc0805-16850409.pdf?src-supplier=Future+Electronics, ComponentLink6URL=https://datasheet.ciiva.com/16850/rc0805-16850409.pdf?src-supplier=Future+Electronics, Construction=Rectangular, Depth=1.25mm, Features="Moisture Resistant", Height=0.024inch, Lead Free="Lead Free", Length=0.079inch, Manufacturer Part Number=RC0805FR-071KL, Military Standard=Not, Number of Pins=2, Number of Terminations=2, Packaging="Tape and Reel", Power Rating=125mW, Pricing 1="1=0.10000, 10=0.03600, 100=0.01480, 1000=0.00666, 2500=0.00578 (USD)", Reach SVHC Compliant=Yes, RoHS=Yes, RoHS Compliant=Yes, Series=RC, Size Code=0805, Stock 1=9084773, Supplier 1=Digi-Key, Termination=SMD/SMT, Tolerance=1%, Voltage Rating (DC)=150V, Width=0.049inch
R7: library part RC0805FR-077K15L, "RES SMD 7K15 OHM 1% 1/8W 0805 Thick Film 2.0 x 1.2 mm 100ppm/ C Molded SMD Paper T/R", Case Code (Imperial)=0805, Case Code (Metric)=2012, Manufacturer=Yageo, Max Operating Temperature=155°C, Max Power Dissipation=125mW, Min Operating Temperature=-55°C, Package Quantity=1, Resistance=7.15kR, Resistor Type="Thick Film", Supplier Part Number 1=311-7.15KCRCT-ND, Temperature Coefficient=100ppm/°C, Tolerance=1%, Voltage Rating=150V, Case/Package=0805, Category="Chip SMD Resistors", ComponentLink1Description=https://datasheet.ciiva.com/2509/pyu-r-int-thick-7-2509532.pdf?src-supplier=Digi-Key, ComponentLink1URL=https://datasheet.ciiva.com/2509/pyu-r-int-thick-7-2509532.pdf?src-supplier=Digi-Key, ComponentLink2Description=https://datasheet.ciiva.com/2509/pyu-r-int-thick-7-2509533.pdf?src-supplier=Digi-Key, ComponentLink2URL=https://datasheet.ciiva.com/2509/pyu-r-int-thick-7-2509533.pdf?src-supplier=Digi-Key, ComponentLink3Description=https://datasheet.ciiva.com/2509/pyu-r-int-thick-7-2509531.pdf?src-supplier=Digi-Key, ComponentLink3URL=https://datasheet.ciiva.com/2509/pyu-r-int-thick-7-2509531.pdf?src-supplier=Digi-Key, ComponentLink4Description=https://datasheet.ciiva.com/5561/rc0805-5561850.pdf?src-supplier=Mouser, ComponentLink4URL=https://datasheet.ciiva.com/5561/rc0805-5561850.pdf?src-supplier=Mouser, ComponentLink5Description=https://datasheet.ciiva.com/17053/rc0805-17053637.pdf?src-supplier=Future+Electronics, ComponentLink5URL=https://datasheet.ciiva.com/17053/rc0805-17053637.pdf?src-supplier=Future+Electronics, Construction=Rectangular, Contact Plating=Tin,Matte,Lead, Depth=1.25mm, Features="Moisture Resistant", Height=0.024inch, Lead Free="Lead Free", Length=2mm, Manufacturer Part Number=RC0805FR-077K15L, Military Standard=Not, Number of Terminations=2, Packaging="Tape and Reel", Power Rating=125mW, Pricing 1="1=0.10000, 10=0.03600, 100=0.01480, 1000=0.00666, 2500=0.00578 (USD)", Radiation Hardening=No, RoHS=Yes, RoHS Compliant=Yes, Series=RC, Size Code=0805, Stock 1=115604, Supplier 1=Digi-Key, Termination=SMD/SMT, Voltage Rating (DC)=150V, Weight=0.000194oz, Width=1.25mm
R10 R11 R21: library part RC0805JR-070RL, "JUMPER SMD 0 OHM 150V 1/8W 0805", Case Code (Imperial)=0805, Case Code (Metric)=2012, Manufacturer=Yageo, Max Operating Temperature=155°C, Max Power Dissipation=125mW, Min Operating Temperature=-55°C, Resistance=0mR, Resistance Tolerance=5%, Resistor Type="Thick Film", Supplier Part Number 1=311-0.0ARCT-ND, Temperature Coefficient=200ppm/°C, Voltage Rating=150V, Case/Package=0805, Category="Chip SMD Resistors", ComponentLink1Description=https://datasheet.ciiva.com/11819/0900766b8106beab-11819430.pdf?src-supplier=RSComponents, ComponentLink1URL=https://datasheet.ciiva.com/11819/0900766b8106beab-11819430.pdf?src-supplier=RSComponents, ComponentLink2Description=https://datasheet.ciiva.com/7941/1738694-7941861.pdf?src-supplier=Element14, ComponentLink2URL=https://datasheet.ciiva.com/7941/1738694-7941861.pdf?src-supplier=Element14, ComponentLink3Description=https://datasheet.ciiva.com/7941/1738694-7941862.pdf?src-supplier=Element14, ComponentLink3URL=https://datasheet.ciiva.com/7941/1738694-7941862.pdf?src-supplier=Element14, ComponentLink4Description=https://datasheet.ciiva.com/7941/1738694-7941863.pdf?src-supplier=Element14, ComponentLink4URL=https://datasheet.ciiva.com/7941/1738694-7941863.pdf?src-supplier=Element14, ComponentLink5Description=https://datasheet.ciiva.com/15190/getdatasheetpartid-330685-15190028.pdf?src-supplier=Verical, ComponentLink5URL=https://datasheet.ciiva.com/15190/getdatasheetpartid-330685-15190028.pdf?src-supplier=Verical, Construction=Rectangular, Contact Plating=Tin,Matte, Depth=1.25mm, Features="Moisture Resistant", Height=0.5mm, Lead Free="Lead Free", Length=2mm, Manufacturer Part Number=RC0805JR-070RL, Military Standard=Not, Number of Pins=2, Number of Terminations=2, Packaging="Tape and Reel", Power Rating=125mW, Pricing 1="1=0.10000, 10=0.03100, 25=0.02280, 50=0.01720, 100=0.01280, 250=0.00972, 500=0.00778, 1000=0.00573 (USD)", Radiation Hardening=No, RoHS=Yes, RoHS Compliant=Yes, Series=RC, Size Code=0805, Stock 1=5377250, Supplier 1=Digi-Key, Technology="THICK FILM", Termination=SMD/SMT, Tolerance=5%, Voltage Rating (DC)=150V, Width=1.25mm
R12: library part PT01-D120D-B502, "POT 5K OHM Panel Mount/Through Hole, Rotary Potentiometer", Manufacturer="CUI Devices", Supplier Part Number 1=2223-PT01-D120D-B502-ND, ComponentLink1Description=https://datasheet.octopart.com/PT01-D120D-B502-CUI-Devices-datasheet-158883457.pdf?src-supplier=CUI+Devices, ComponentLink1URL=https://datasheet.octopart.com/PT01-D120D-B502-CUI-Devices-datasheet-158883457.pdf?src-supplier=CUI+Devices, Manufacturer Part Number=PT01-D120D-B502, Pricing 1="1=0.79000, 10=0.66600, 25=0.61720, 50=0.58200, 100=0.54700, 250=0.47200, 1000=0.44100, 2500=0.41800 (USD)", Stock 1=984, Supplier 1=DigiKey